# Altium PCB STM_BLUEPILL.PcbDoc
Units mil, origin at the board's own origin, x right, y up, seen from the top; angles counter-clockwise.
Board outline 2100 x 900 mil, 2 copper layers (Top Layer, Bottom Layer); 30 components, 49 nets, 163 pads, 40 vias.
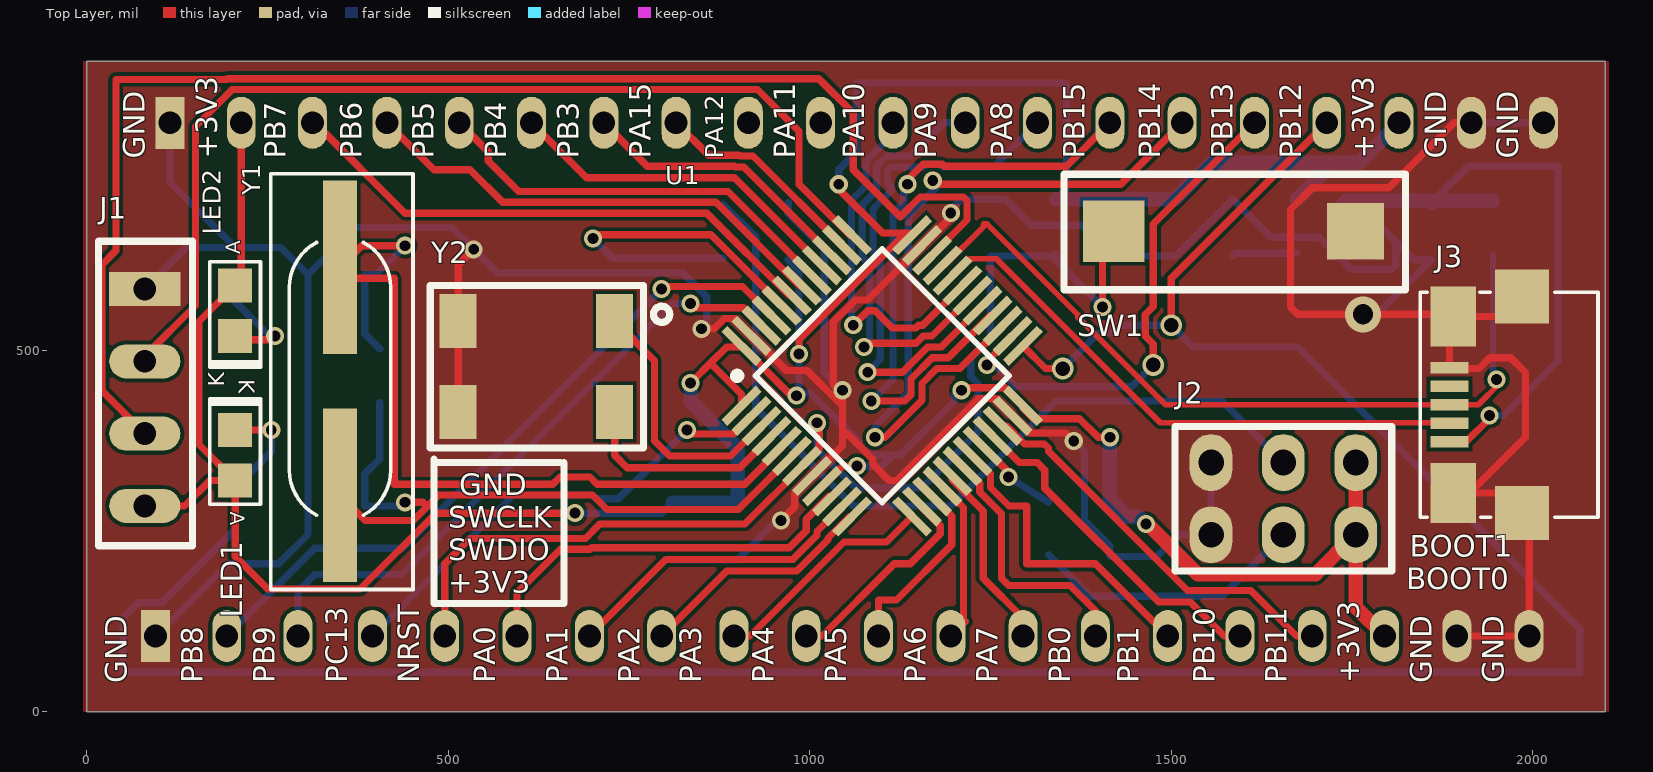
[diagram p0: Top Layer view]
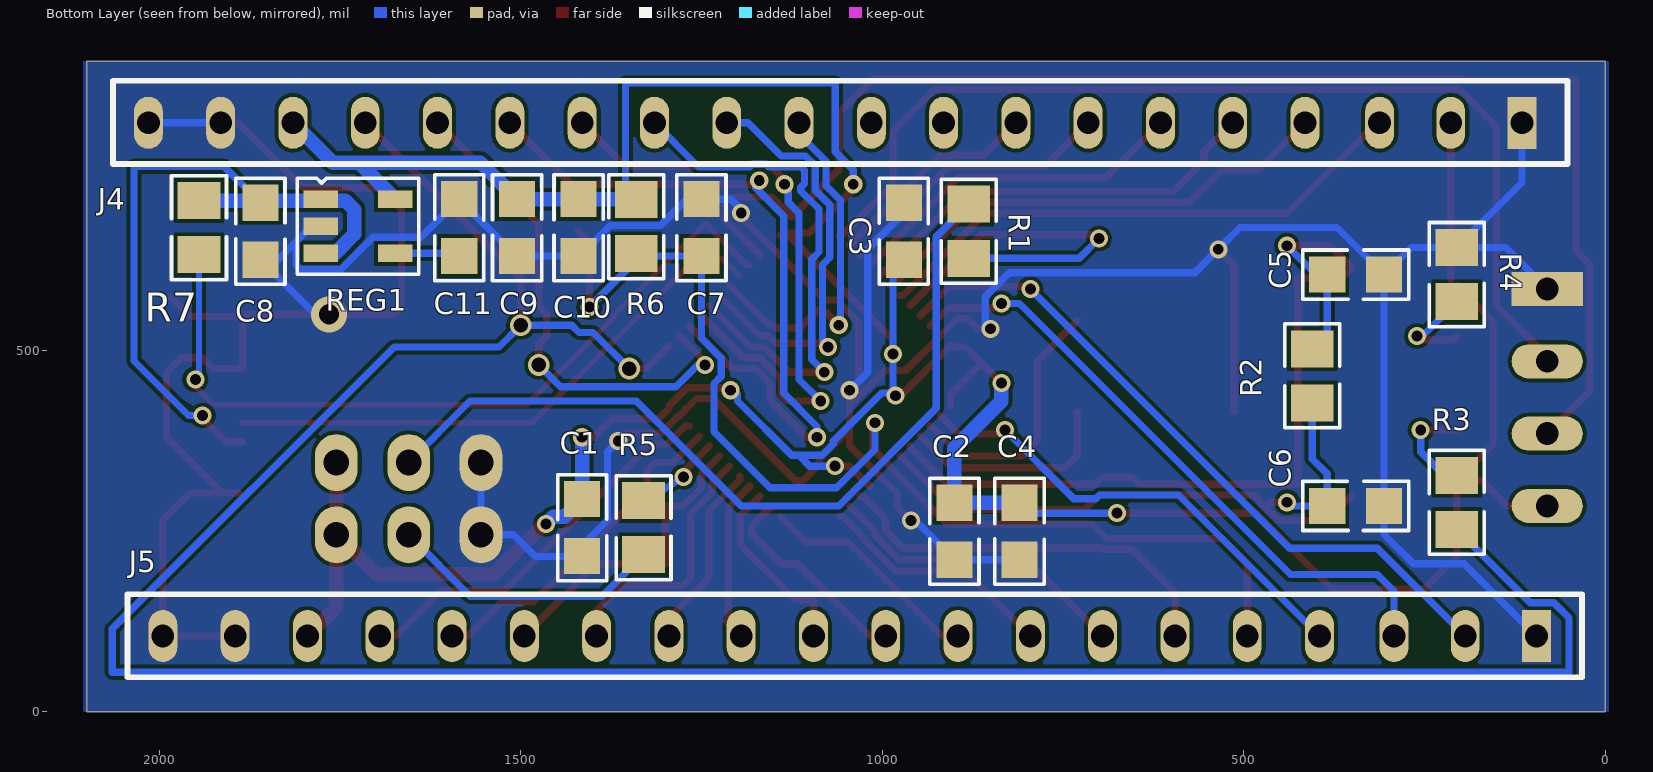
[diagram p1: Bottom Layer view, seen from below]
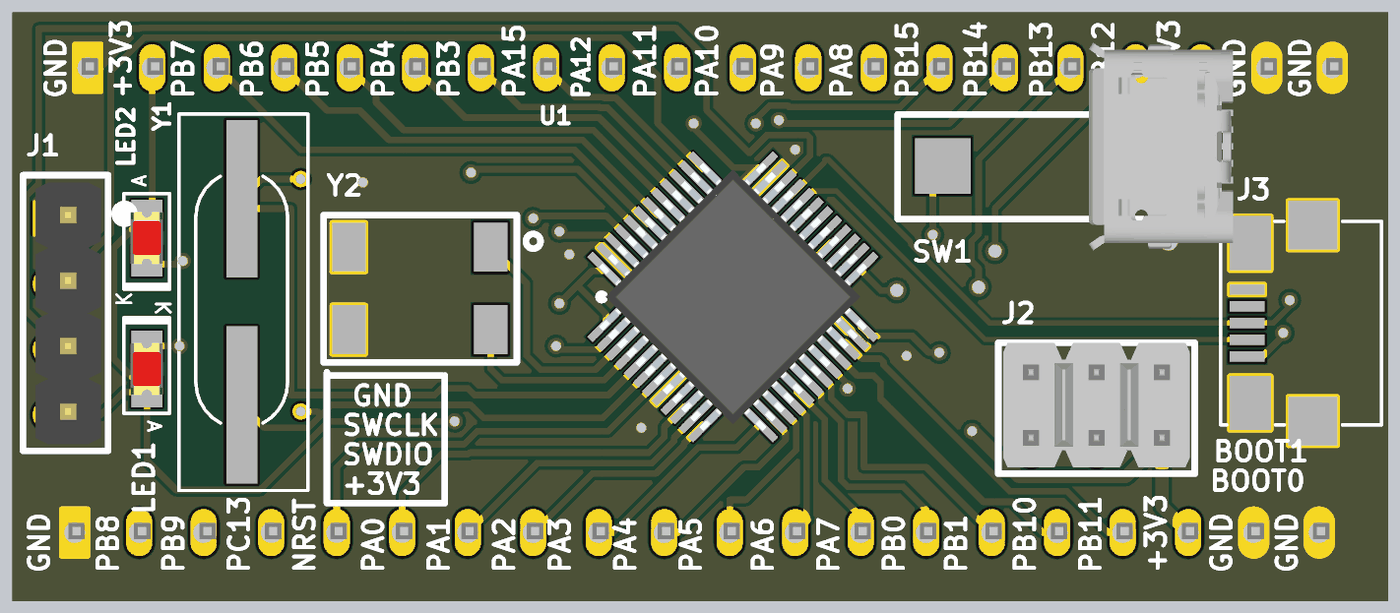
[diagram p2: 3D render of the assembled board from above, using the file's embedded part models]
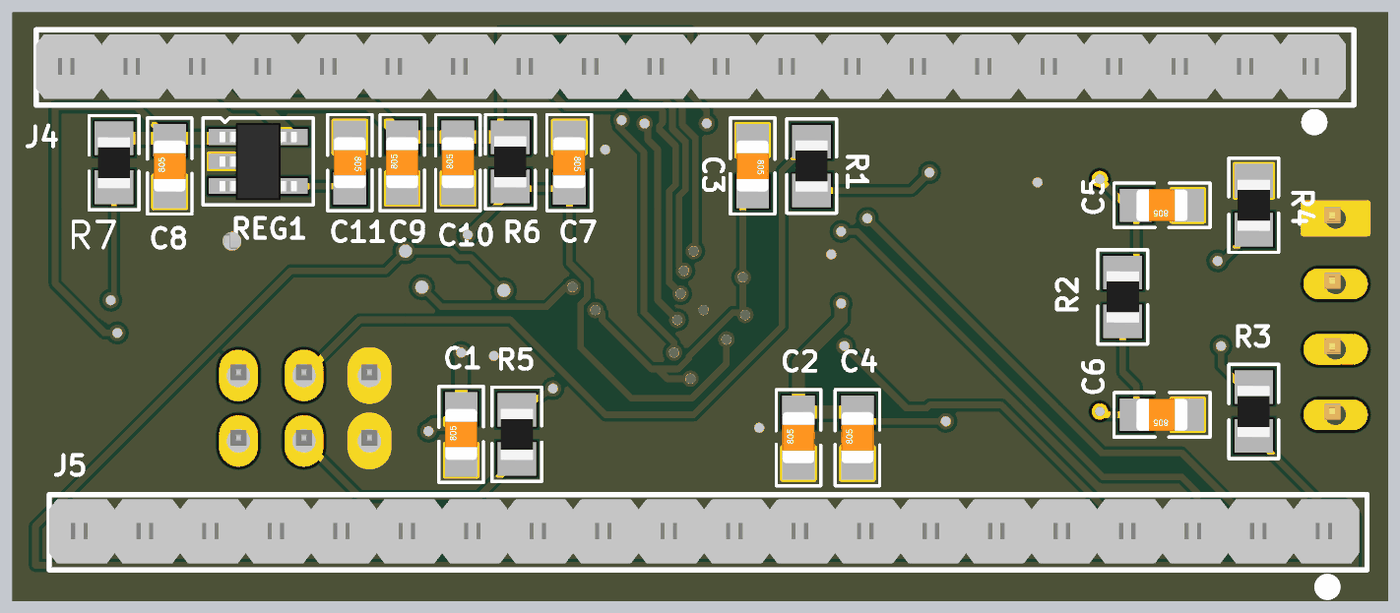
[diagram p3: 3D render of the assembled board from below, using the file's embedded part models]

## Layer stack, top to bottom
Top Layer: signal copper 1.4
Dielectric: dielectric 12.6, FR-4, Dk 4.8
Bottom Layer: signal copper 1.4

## Board outline
0,0 2100,0 2100,900 0,900

## Design rules (kind name [scope] priority, off if disabled: settings)
Clearance [All] p1: gap=5
DiffPairsRouting DiffPair_90DiffPairsRouting [InDifferentialPair ('D')] p1: maxlimit=10 minlimit=10 mostfreqgap=10 maxuncoupledlength=500
DiffPairsRouting [All] p2: maxlimit=10 minlimit=10 mostfreqgap=10 maxuncoupledlength=500
MatchedLengths DiffPair_90MatchedLengths [InDifferentialPair ('D')] p1: tolerance=1000 checknetsindiffpair=TRUE checkdiffpairvsdiffpair=TRUE checkothers=TRUE
PolygonConnect [All] p1: connectstyle=Direct reliefconductorwidth=10 reliefentries=4 polygonreliefangle="90 Angle"
RoutingVias [All] p1: holewidth=20 width=35 viastyle="Through Hole" minholewidth=10 minwidth=20 maxholewidth=28 maxwidth=50
SilkToSilkClearance [All] p1: silktosilkclearance=5
SilkscreenOverComponentPads SilkToSolderMaskClearance [IsPad] p1: minsilkscreentomaskgap=10
SolderMaskExpansion [All] p1: expansion=4
TestPointUsage FabricationTestPointUsage [All] p1: valid=0 allowmultiple=FALSE
Testpoint FabricationTestpoint [All] p1: side=3 testpointundercomponent=TRUE minsize=40 maxsize=100 preferedsize=60 minholesize=0 maxholesize=40 preferedholesize=32 testpointgrid=1 style=297 order=0123456789
Width DiffPair_90Width [InDifferentialPair('D')] p1: maxlimit=8 minlimit=8 preferedwidth=8
Width [All] p2: maxlimit=50 minlimit=10 preferedwidth=10
21 further rules are at their usual default settings.

## Classes and differential pairs
component class "[2]- Connector_Page": C8 C9 C10 C11 J3 J4 J5 R7 REG1
component class [1]-Controller_Page: C1 C2 C3 C4 C5 C6 C7 J1 J2 LED1 LED2 R1 R2 R3 R4 R5 R6 SW1 U1 Y1 Y2
differential pair D: +D_P -D_N

## Components (designator, comment, footprint, x,y, rotation, side; value= is the part's Value field where it differs from the comment)
C1 "0.1uF" CAP_0805 1415,255 r90 bottom
C2 "0.1uF" CAP_0805 900,250 r90 bottom
C3 "0.1uF" CAP_0805 970,665 r270 bottom
C4 "0.1uF" CAP_0805 810,250 r90 bottom
C5 "22pF" CAP_0805 345,605 r0 bottom
C6 "22pF" CAP_0805 345,285 r0 bottom
C7 "0.1uF" CAP_0805 1250,670.01 r270 bottom
C8 "0.1uF" CAP_0805 1860,665 r90 bottom
C9 "0.1uF" CAP_0805 1505,670 r90 bottom
C10 "1uF" CAP_0805 1420,670 r90 bottom
C11 "22pF" CAP_0805 1585,670 r270 bottom
J1 "4X1 Bergstrip" CON4_100_40D72_TH_ST_MALE 80,585 r0 top
J2 "2X3 Berg Strip" CON6_100_59D78_TH_ST_Duplicate 1755,345 r180 top
J3 "MICRO USB2.0" CON_10118192-0001LF_SMD 1935,425 r90 top
J4 "20X1 Bergstrip" CON20_100_40D72_TH_ST 115,815 r270 bottom
J5 "20X1 Bergstrip" CON20_100_40D72_TH_ST 95,105 r270 bottom
LED1 "RED LED" LED_0805 205,355 r270 top
LED2 "RED LED" LED_0805 205,555 r90 top
R1 "10K" RES_0805 880,665 r270 bottom
R2 "10Mohm" RES_0805 405,465 r90 bottom
R3 "1K" RES_0805 205,290 r270 bottom
R4 "1K" RES_0805 205,605 r90 bottom
R5 "10K" RES_0805 1330,255 r90 bottom
R6 "10K" RES_0805 1340,671.38 r270 bottom
R7 "10K" RES_0805 1945,670 r270 bottom
REG1 "RT9193-33GB" SOT23-5 1725,671.87 r270 bottom
SW1 "TACT SWITCH" SW_342_SMD 1755,665 r0 top
U1 "STM32F103C8T6" LQFP-48_19.6_393_58X11_SMD 1100,465 r45 top
Y1 "8MHz" XTAL_314_240X47_SMD 350,615 r270 top
Y2 "32.768KHz" "XTAL_MC-405 32.7680K-G3" 730,415 r180 top

## Footprints (in the part's own frame and the unit in brackets; to place one, negate y for a bottom-side part, rotate by r counter-clockwise, add the part's x,y. Pads: shape width x height; smd on the part's side, far side on the other; paste and mask are expansions set on the pad)
CAP_0805 [mil] "Ceramic Capacitor"
  rect 50x50 smd mask+3: 1(-39.37,0) 2(39.37,0)
  silkscreen extent -73,-34 73,34, body extent -39,-25 39,25, height 31
CON4_100_40D72_TH_ST_MALE [mm] "Berg Strip"
  rect 2.5x1.2 hole 0.8: 1(0,0)
  oval 2.5x1.2 hole 0.8: 2(0,-2.54) 3(0,-5.08) 4(0,-7.62)
  round 1.016 on Top Overlay: ""(2.311,0.178)
  silkscreen extent -1.63,-9.02 1.68,1.68, body extent -1.14,-8.76 1.4,1.4, height 8.55
CON6_100_59D78_TH_ST_Duplicate [mm] "Berg strip"
  oval 1.5x2 hole 0.9: 1(0,0) 2(0,2.54) 3(2.54,0) 4(2.54,2.54) 5(5.08,0) 6(5.08,2.54)
  silkscreen extent -1.27,-1.27 6.35,3.81, body extent -1.07,-1.27 6.15,3.56, height 8.18
CON20_100_40D72_TH_ST [mil] "Berg strip"
  rect 72x40 hole 31.5: 1(0,0)
  oval 72x40 hole 31.5: 2(0,-98.43) 3(0,-196.85) 4(0,-300) 5(0,-400) 6(0,-500) 7(0,-600) 8(0,-700) 9(0,-800) 10(0,-900) 11(0,-1000) 12(0,-1100) 13(0,-1200) 14(0,-1300) 15(0,-1400) 16(0,-1500) 17(0,-1600) 18(0,-1700) 19(0,-1800) 20(0,-1900)
  round 40 on Bottom Overlay: ""(83,2.57)
  silkscreen extent -58,-1949 57,63, body extent -51,-1949 47,51, height 323
CON_10118192-0001LF_SMD [mm] "USB2.0 MICRO"
  rect 0.4x1.35 smd: 1(-1.3,1.275) 2(-0.65,1.275) 3(0,1.275) 4(0.65,1.275) 5(1.3,1.275)
  rect 2.1x1.6 smd: 6(-3.1,1.15) 7(3.1,1.15)
  rect 1.9x1.9 smd: 8(-3.8,-1.275) 9(3.8,-1.275)
  silkscreen extent -3.95,-3.94 3.95,2.3, body extent -4.04,-3.94 4.04,1.66, height 2.81
LED_0805 [mm] "LED"
  rect 1.2x1.2 smd mask+0.076: A(0.889,0) K(-0.889,0)
  silkscreen extent -1.99,-0.89 1.73,0.89, body extent -1.01,-0.62 1.01,0.63, height 1.1
LQFP-48_19.6_393_58X11_SMD [mm] "48LQFP"
  rect 1.7x0.3 smd mask+0.076: 1(-4.238,2.75) 2(-4.238,2.25) 3(-4.238,1.75) 4(-4.238,1.25) 5(-4.238,0.75) 6(-4.238,0.25) 7(-4.238,-0.25) 8(-4.238,-0.75) 9(-4.238,-1.25) 10(-4.238,-1.75) 11(-4.238,-2.25) 12(-4.238,-2.75) 25(4.238,-2.75) 26(4.238,-2.25) 27(4.238,-1.75) 28(4.238,-1.25) 29(4.238,-0.75) 30(4.238,-0.25) 31(4.238,0.25) 32(4.238,0.75) 33(4.238,1.25) 34(4.238,1.75) 35(4.238,2.25) 36(4.238,2.75)
  rect 0.3x1.7 smd mask+0.076: 13(-2.75,-4.238) 14(-2.25,-4.238) 15(-1.75,-4.238) 16(-1.25,-4.238) 17(-0.75,-4.238) 18(-0.25,-4.238) 19(0.25,-4.238) 20(0.75,-4.238) 21(1.25,-4.238) 22(1.75,-4.238) 23(2.25,-4.238) 24(2.75,-4.238) 37(2.75,4.238) 38(2.25,4.238) 39(1.75,4.238) 40(1.25,4.238) 41(0.75,4.238) 42(0.25,4.238) 43(-0.25,4.238) 44(-0.75,4.238) 45(-1.25,4.238) 46(-1.75,4.238) 47(-2.25,4.238) 48(-2.75,4.238)
  silkscreen extent -3.72,-3.15 3.15,3.72, body extent -4.5,-4.5 4.5,4.5, height 1.7
RES_0805 [mm] "Resister"
  rect 1.3x1.5 smd mask+0.076: 1(0.95,0) 2(-0.95,0)
  silkscreen extent -1.83,-0.97 1.83,0.97, body extent -1,-0.63 1,0.62, height 0.5
SOT23-5 [mm] "CASE: SOT"
  rect 0.62x1.22 smd mask+0.076: 1(-0.953,-1.31) 2(-0.003,-1.31) 3(0.947,-1.31) 4(0.952,1.31) 5(-0.953,1.31)
  silkscreen extent -1.69,-2.14 1.69,2.14, body extent -1.5,-1.5 1.5,1.5, height 1.41
SW_342_SMD [mm] "CASE: SMD"
  rect 2x2 smd: 1(0,0)
  rect 2.15x2.15 smd: 2(-8.5,0)
  silkscreen extent -10.25,-2.06 1.75,2, body extent -7.17,-1.79 -1.17,1.71, height 2.4
XTAL_314_240X47_SMD [mm] "CASE: TH"
  rect 6.096x1.2 smd: 1(0,0) 2(8,0)
  silkscreen extent -3.29,-2.44 11.32,2.57, body extent -2.99,-2.27 10.9,2.41, height 3.05
"XTAL_MC-405 32.7680K-G3" [mm] "Crystal"
  rect 1.3x1.9 smd: 1(0,-3.2) 2(5.5,-3.2) 3(5.5,0) 4(0,0)
  silkscreen extent -1.93,-4.44 6.48,1.27, body extent -1.02,-4.44 6.48,1.27, height 3.6

## Part data
C1 C2 C3 C4 C7 C8 C9: library part CAP_0.1uF-50V-5%-0805, "0.1µF ±5% 50V Ceramic Capacitor X7R 0805 (2012 Metric)"
C5 C6 C11: library part CAP_22pF-50V-5%-0805, "22pF ±5% 50V Ceramic Capacitor C0G, NP0 0805 (2012 Metric)"
C10: library part CAP_1uF-50V-5%-0805, "1µF ±5% 50V Ceramic Capacitor X7R 0805 (2012 Metric)"
J1: library part CON-BS-PLG_4X1-100-TH-ST, "4 pin, 1 row, 2.54mm pitch bergstrip"
J2: library part CON-BS-PLG_2X3-100-TH-ST, "6 pin, 2 row, 2.54mm pitch bergstrip"
J3: library part CON-USB_10118192-0002LF-SMD, "USB - micro B USB 2.0 Receptacle Connector 5 Position Surface Mount, Right Angle"
J4 J5: library part CON-BS-PLG_20X1-100-TH-ST, "20 pin, 1 row, 2.54mm pitch bergstrip"
LED1 LED2: library part LED-RED_10mA-0805, "Red 621nm LED Indication - Discrete 2V 0805 (2012 Metric)"
R1 R5 R6 R7: library part RES_10K-0.125W-1%-0805, "10 kOhms ±1% 0.125W, 1/8W Chip Resistor 0805 (2012 Metric) Moisture Resistant Thick Film"
R2: library part RES_10MOHM-0.125W-1%-0805, "10 MOhms ±1% 0.125W, 1/8W Chip Resistor 0805 (2012 Metric) Automotive AEC-Q200, High Voltage Thick Film"
R3 R4: library part RES_1K-0.125W-1%-0805, "1 kOhms ±1% 0.125W, 1/8W Chip Resistor 0805 (2012 Metric) Moisture Resistant Thick Film"
REG1: library part REG_3.3V-5.5V-0.3A-SOT-23-5, "Linear Voltage Regulator IC 1 Output 300mA SOT-23-5"
SW1: library part SW_KSR223GLFG-SMD, "Tactile Switch SPST-NO Top Actuated Surface Mount"
U1: library part "IC-STM32F103C8T6 _1", "ARM® Cortex®-M3 STM32F1 Microcontroller IC 32-Bit 72MHz 64KB (64K x 8) FLASH"
Y1: library part XTAL_8MHZ-LFXTAL030234, "Crystals 8MHz 22pF -20C 70C"
Y2: library part "XTAL_32.768KHz-MC-405 32.7680K-G3", "Crystals SMD AT XTL MHZ +/-50PPM 12.5 PF 250 T/R"

## Via types
v1: diameter 25, hole 15, Top Layer to Bottom Layer, tented both sides, 34 vias
v2: diameter 30, hole 20, Top Layer to Bottom Layer, tented both sides, 3 vias
v3: diameter 25, hole 15, Top Layer to Bottom Layer, 2 vias
v4: diameter 50, hole 28, Top Layer to Bottom Layer, tented both sides, 1 vias

## Nets (pads, with @x,y where several pads share a name; then routed paths per layer and width w, separated by ;. In a path a pad name is that pad's centre, name@x,y a point inside that pad or via, vN(x,y) a via of type N, cw(c..) or ccw(c..) an arc to the next point about the centre after c; other vN are vias at no path point)
+3V3: C1.2 C2.2 C3.2 C4.2 C9.2 C10.2 J1.4 J2.1 J2.2 J4.2 J4.18 J5.18 LED1.A LED2.A R6.2 REG1.5 U1.1 U1.9 U1.24 U1.36 U1.48 | length 5163.8
  Top Layer w10: J1.4 135,285 170,320 LED1.A ; LED2.A 155,540 155,370 LED1.A ; LED2.A@213.43,598.42 J4.2 ; v1(675,275) 482.72,275 377.76,170.04 250.04,170.04 250,170 205,215 LED1.A ; v1(835,455) 865,485 ; U1.48@905,505 885,505 865,485 ; U1.1 905.46,439.54 865,480 865,485 ; U1.48 974.39,437.5 v1(981.29,437.5) ; v1(985,495) 985,515 1129.54,659.54 U1.36 1138.46,662.5 1100.68,662.5 1040,723.18 v1(1040,730) ; U1.9 1017.22,312.22 1045,340 v1(1065,340) ; v1(1210,445) 1210,446.39 1212.18,448.58 1269.54,448.58 U1.24 ; U1.24@1295,420 1309.26,405.74 1373.15,405.74 1398.89,380 v1(1415,380)
  Top Layer w20: v1(1465,260) 1467.19,260 1536.56,190.63 1699.53,190.63 1753.9,245 J2.2 ; J2.1 J2.2 ; J5.18 1755,145 J2.2
  Bottom Layer w10: v1(675,275) 795.63,275 C4.2 ; C3.2 985,610.62 v1(985,495) 985,441.21 1000.61,441.21 1067.5,374.32 1067.5,370.68 1083.18,355 1115,355 ; v1(1040,730) 1040,750 1065,775 1065,870 1355,870 1355,723.78 1340.6,709.37 R6.2 ; v1(1065,340) 1100,340 1115,355 ; v1(1210,445) 1205,445 1200,440 1200,430 1125,355 1115,355
  Bottom Layer w20: C4.2 C2.2 900,365 835,430 v1(835,455) ; R6.2@1340.6,709.37 C10.2 C9.2 1555.63,760 1724.06,760 ; v1(1415,380) C1.2 1439.38,270 1455,270 v1(1465,260) ; REG1.5 1724.06,760 ; J4.18 1760,760 1724.06,760
+5V: C8.2 J3.1 R7.2 REG1.1 REG1.3 | length 975.8
  Top Layer w10: J3.1 1907.8,373.82 1940,406.02 v1(1940,410)
  Bottom Layer w10: C8.2@1863.03,707.4 1910.63,755 2035,755 2035,485.5 1959.5,410 v1(1940,410)
  Bottom Layer w20: REG1.3 1756.55,634.57 1730,661.12 1730,695 1742.4,707.4 C8.2@1863.03,707.4 ; C8.2 C8.2@1863.03,707.4 ; R7.2 C8.2@1863.03,707.4
BOOT0: J2.3 R1.2 | length 1182.2
  Bottom Layer w10: R1.2 925,657.4 925,420 1060,285 1195,285 1340,430 1570,430 J2.3
BOOT1: J2.4 R5.2 | length 384.1
  Bottom Layer w10: R5.2 1387.6,160 1570,160 J2.4
D_N: J3.2 U1.32 | length 791.4
  Top Layer w8: U1.32 1198.11,603.86 1221.03,626.78 1257.76,626.78 1484.54,400 1884.21,400 J3.2
D_P: J3.3 R7.1 U1.33 | length 1096.5
  Top Layer w8: U1.33 1186.58,617.78 1239.71,670.92 1239.71,674.31 1240.4,675 1245,675 1371,549 1371,545.92 1491.92,425 J3.3 1924.59,425 1954.59,455 1954.59,455.41 v1(1950,460)
  Bottom Layer w8: R7.1 1945,465 v1(1950,460)
GND: C1.1 C2.1 C3.1 C4.1 C5.1 C6.1 C7.1 C8.1 C9.1 C10.1 C11.1 J1.1 J2.5 J2.6 J3.5 J3.6 J3.7 J3.8 J3.9 J4.1 J4.19 J4.20 J5.1 J5.19 J5.20 R4.1 REG1.2 SW1.1 U1.8 U1.23 U1.35 U1.47 Y2.2 Y2.3 | length 6816.5
  Top Layer w10: Y2.3 Y2.2 513.46,618.46 v1(535,640) ; v1(850,530) 867.57,530 881.83,544.26 895.74,544.26 919.38,520.62 U1.47 967.23,472.5 995.79,472.5 1045,423.29 1045,394.73 ; v1(960,265) 978.98,283.98 978.98,302.22 U1.8 1045,368.24 1045,385 ; v1(1045,445) v1@1040,445 ; v1(1195,690) 1195,684.29 1156.33,645.62 U1.35 1079.73,570 1063.18,570 1032.5,539.32 1032.5,452.5 v1@1040,445 ; v1(1365,375) 1354.26,385.74 1305.62,385.74 1281.7,409.66 U1.23 1256.7,433.58 1233.58,433.58 1120,320 1110,320 1087.5,342.5 1087.5,349.32 1051.82,385 1045,385 ; J3.7@1886.77,550 v4(1765,550) 1675,550 1665,560 1665,695 1695,725 1801,725 1891,815 J4.19 ; J5.19 J5.20 1995,265.59 1957.64,302.95 J3.6 1912.95,302.95 1990,380 1990,469.49 1969.49,490 1940.5,490 1925.5,475 1885.98,475 J3.5 1884.8,542.13 J3.7 1957.64,547.05 J3.9 ; v1@1040,445 1045,440 1045,394.73 ; 1045,385 1045,394.73
  Bottom Layer w10: J1.1 137.4,642.4 R4.1 ; J5.1 195,205 265,205 305.63,245.63 C6.1 C5.1 ; J4.1 115,732.41 R4.1 ; C4.1 C2.1 954.37,265 v1(960,265) ; v1(850,530) 855.14,530 857.5,532.36 857.5,574.32 824.32,607.5 567.5,607.5 v1(535,640) 505,670 370.64,670 C5.1 ; C3.1 970,690 1020,640 1020,470 v1(1045,445) ; v1(1195,690) 1195,695 1209.37,709.37 C7.1 1270.14,709.37 1306.33,673.18 1375.9,673.18 1418.45,630.63 1506.26,630.63 C11.1 1637.79,656.58 1704.21,656.58 1748.42,612.37 1804.74,612.37 1810.59,618.22 1810.59,650.92 ; v1(1365,375) 1380,360 1380,265.23 1415,230.23 C1.1 1415.64,215 1480,215 1510,245 J2.6 J2.5 ; v4(1765,550) 1771.26,543.74 1778.11,543.74 C8.1 1835.88,625.63 1810.59,650.92 ; REG1.2 1789.54,671.97 1810.59,650.92 ; J4.19 J4.20 ; R4.1 268.23,642.4 C5.1
NetC11_2: C11.2 REG1.4 | length 90
  Bottom Layer w10: C11.2 1588.74,634.37 REG1.4
NetLED1_K: LED1.K R3.2 | length 143.5
  Top Layer w10: LED1.K v1(255,390)
  Bottom Layer w10: R3.2 222.4,327.4 255,360 v1(255,390)
NetLED2_K: LED2.K R4.2 | length 133.9
  Top Layer w10: LED2.K 210,515 255,515 v1(260,520)
  Bottom Layer w10: R4.2 252.6,520 v1(260,520)
NetR1_1: R1.1 U1.44 | length 495.1
  Top Layer w10: v1(700,655) 705,660 863.24,660 U1.44
  Bottom Layer w10: v1(700,655) 727.4,627.6 R1.1
NetR5_1: R5.1 U1.20 | length 123.1
  Top Layer w10: U1.20 1275,331.76 v1(1275,325)
  Bottom Layer w10: v1(1275,325) R5.1@1330,290
NRST: C7.2 J5.5 R6.1 SW1.2 U1.7 | length 1597.4
  Top Layer w10: J5.5 495,205 530,240 689.5,240 709.5,260 910,260 988.98,338.98 U1.7 1012.9,363.98 1012.9,397.1 v1(1010,400) ; v1(1405,560) 1405,649.65 SW1.2
  Bottom Layer w10: v1(1010,400) 1010,363.18 1063.18,310 1155,310 1232.5,387.5 1232.5,454.32 1222.5,464.32 1222.5,489.32 1250,516.82 C7.2 1336.66,630.63 R6.1 1340,625 v1(1405,560)
PA0: J5.6 U1.10 | length 560.3
  Top Layer w10: J5.6 595,165 655,225 695.71,225 697.84,227.13 971.62,227.13 995,250.5 995,266.41 1026.9,298.3 U1.10
PA1: J5.7 U1.11 | length 427.1
  Top Layer w10: J5.7 801.06,211.06 810,211.06 976.77,211.06 1010,244.29 1010,249.73 U1.11
PA2: J5.8 U1.12 | length 333.7
  Top Layer w10: J5.8 885,195 981.92,195 1025,238.08 1025,240.73 1054.73,270.46 U1.12
PA3: J5.9 U1.13 | length 315
  Top Layer w10: J5.9 917.11,105 1047.11,235 1105.96,235 U1.13
PA4: J5.10 U1.14 | length 292.2
  Top Layer w10: J5.10 1016.87,105 1116.87,205 1138.93,205 1180.33,246.39 1180.33,257.48 1155.34,282.46 U1.14
PA5: J5.11 U1.15 | length 261.2
  Top Layer w10: J5.11 1095,155 1120,155 1196.39,231.39 1196.39,271.18 U1.15
PA6: J5.12 U1.16 | length 228.7
  Top Layer w10: U1.16 1212.45,282.95 1212.45,127.55 1215,125 J5.12
PA7: J5.13 U1.17 | length 261.7
  Top Layer w10: U1.17 1197.1,320.97 1240,278.08 1240,185 1295,130 J5.13
PA8: J4.13 U1.29 | length 737.8
  Top Layer w10: v1(1080,470) 1128.08,470 1163.08,505 1181.76,505 U1.29
  Bottom Layer w10: v1(1080,470) 1097.5,487.5 1097.5,626.22 1087.5,636.22 1087.5,695.58 1112.5,720.58 1112.5,725.68 1107.5,730.68 1107.5,749.32 1112.18,754 1157.18,754 1160.68,757.5 1179.32,757.5 1182.82,754 1254,754 J4.13
PA9: J4.12 U1.30 | length 592.6
  Top Layer w10: v1(1075,505) 1080,510 1146.86,510 1156.86,520 1168.92,520 U1.30
  Bottom Layer w10: v1(1075,505) 1082.5,512.5 1082.5,618.5 1072.5,628.5 1072.5,701.79 1092.5,721.79 1092.5,755.53 1105.97,769 1139.71,769 1185.71,815 J4.12
PA10: J4.11 U1.31 | length 498.4
  Top Layer w10: v1(1060,535) 1080,555 1090,555 1113.92,531.08 1146.73,531.08 1150.65,535 1156.08,535 U1.31
  Bottom Layer w10: v1(1060,535) 1057.5,537.5 1057.5,708 1077.5,728 1077.5,761.75 1115,799.25 J4.11
PA11: J4.10
PA12: J4.9
PA15: J4.8 U1.38 | length 299.8
  Top Layer w10: J4.8 860,770 901.57,770 902.57,769 921.27,769 U1.38
PB0: J5.14 U1.18 | length 361.1
  Top Layer w10: U1.18 1234.94,316.14 1234.94,304.35 1265,274.29 1265,185 1275,175 1360,175 1395,140 J5.14
PB1: J5.15 U1.19 | length 430.8
  Top Layer w10: U1.19 1250,328.92 1250,310.5 1275.5,285 1300,285 1300,205 1395,205 J5.15
PB3: J4.7 U1.39 | length 391.7
  Top Layer w10: J4.7 775,755 895.36,755 896.36,754 908.44,754 U1.39
PB4: J4.6 U1.40 | length 483.5
  Top Layer w10: J4.6 691,739 895.6,739 U1.40
PB5: J4.5 U1.41 | length 582.8
  Top Layer w10: J4.5 555,775 555,762.28 597.28,720 886.76,720 U1.41
PB6: J4.4 U1.42 | length 667.2
  Top Layer w10: J4.4 480,750 530,750 575,705 870.08,705 985.14,589.94 U1.42
PB7: J4.3 U1.43 | length 762.2
  Top Layer w10: J4.3 315,815 440,690 857.24,690 971.22,576.02 U1.43
PB8: J5.2 U1.45 | length 970.8
  Top Layer w10: v1(795,585) 798.56,588.56 906.84,588.56 U1.45
  Bottom Layer w10: J5.2 315,226.57 436.57,226.57 v1(795,585)
PB9: J5.3 U1.46 | length 883.3
  Top Layer w10: v1(835,565) 835,561.04 836.79,559.25 875.6,559.25 908.3,559.26 U1.46
  Bottom Layer w10: J5.3 291.85,166.85 315,190 435,190 810,565 v1(835,565)
PB10: J5.16 U1.21 | length 471.5
  Top Layer w10: U1.21 1289.6,345 1314.5,345 1325,334.5 1325,309.6 1482.53,152.06 1526.06,152.06 1573.13,105 J5.16
PB11: J5.17 U1.22 | length 551.4
  Top Layer w10: U1.22 1272.04,395.74 1297.04,370.74 1324.26,370.74 1330,365 1330,360.5 1522.38,168.13 1610,168.13 1673.13,105 J5.17
PB12: J4.17 R3.1 U1.25 | length 3707.2
  Top Layer w10: U1.25 1325.96,475 v2(1350,475) ; v2(1500,535) 1500,600 J4.17
  Bottom Layer w10: R3.1 103.4,151 70.86,151 50,130.14 50,55 2065,55 2065,115 1675,505 1530,505 v2(1500,535) 1429.5,535 1419.5,525 1400,525 v2(1350,475)
PB13: J4.16 U1.26 | length 718.8
  Top Layer w10: v1(1245,480) 1240.27,480 U1.26 ; v2(1475,480) 1475,509 1463.94,520.06 1463.94,549.94 1475,561 1475,675 J4.16
  Bottom Layer w10: v1(1245,480) 1255,480 1285,450 1445,450 v2(1475,480)
PB14: J4.15 U1.27 | length 1028.9
  Top Layer w10: v1(1090,380) 1104,380 1155,431 1155,454.5 1175.5,475 1207.44,475 U1.27 ; v1(1170,735) 1175,730 1430,730 J4.15
  Bottom Layer w10: v1(1090,380) 1090,395 1136.06,441.06 1136.06,660 1136.06,686.06 1175,725 1175,730 v1(1170,735)
PB15: J4.14 U1.28 | length 871.9
  Top Layer w10: v1(1085,430) 1131.28,430 1140,438.72 1140,460.71 1169.29,490 1191.28,490 1249.47,548.18 U1.28 ; v1(1135,730) 1134,731 1134,735 1156.5,757.5 1183.5,757.5 1186,755 1355,755 J4.14
  Bottom Layer w10: v1(1085,430) 1115,460 1115,690 1130,705 1130,725 v1(1135,730)
PC13: J5.4 U1.2 | length 659.1
  Top Layer w10: v1(830,390) 835.33,384.67 894.4,384.67 U1.2
  Bottom Layer w10: J5.4 590,300 699.5,300 704.5,295 735,295 v1(830,390)
SWCLK: J1.2 U1.37 | length 1410.2
  Top Layer w10: J1.2 80,492.17 150,562.17 150,810 201,861 927.43,861 985,803.43 985,730 1055.46,659.54 U1.37
SWDIO: J1.3 U1.34 | length 1934.7
  Top Layer w10: J1.3 20.79,444.21 20.79,618.62 40,637.83 40,875 193.79,875 194.79,876 1012.43,876 1060,828.43 1060,750 1125,685 1152.5,712.5 1212.5,712.5 1217.5,707.5 1217.5,680.68 1169.26,632.44 U1.34
XTALA: C5.2 R2.1 U1.5 Y1.1 | length 1219.3
  Top Layer w10: v3(440,645) 380,645 Y1.1 365,600 425,600 425,315 644.29,315 654.29,325 695.71,325 705.71,315 910,315 961.14,366.14 U1.5
  Bottom Layer w10: R2.1 384.37,523.03 C5.2 400,605 v3(440,645)
XTALB: C6.2 R2.2 U1.6 Y1.2 | length 935
  Top Layer w10: Y1.2 385.04,265 451.51,265 470.76,284.24 ; v3(440,290) 465,290 470.76,284.24 ; U1.6 901.08,280 719.5,280 699.5,300 486.51,300 470.76,284.24
  Bottom Layer w10: R2.2 405,350 384.37,329.37 C6.2 435,285 v3(440,290)
XTALC: U1.3 Y2.1 | length 363.1
  Top Layer w10: Y2.1 785,485.98 785,375 806.06,353.94 890.22,353.94 932.02,395.74 U1.3
XTALD: U1.4 Y2.4 | length 302.1
  Top Layer w10: Y2.4 730,355 747.13,337.87 902.87,337.87 U1.4@946.82,381.82
pads on no net: J1. J3.4 J4. J5.

## Polygon pours and split planes (outlines as drawn)
GND on Top Layer "Top Overlay-No Net" (solid, remove dead copper): -5,900 -5,0 2105,0 2105,900 -5,900
GND on Bottom Layer "Top Overlay-No Net" (solid, remove dead copper): -5,900 -5,0 2105,0 2105,900 -5,900

## Silkscreen, mask and mechanical layers (free items; w line width, h text height)
Top Overlay:
  lines w10: 660,345 660,150 480,150 ; 480,150 480,350 480,150 ; 480,345 655,345 480,345
  text "GND" at 80,765 h30 r90
  text "+3V3" at 180,765 h30 r90
  text "PB7" at 275,765 h30 r90
  text "PB6" at 380,765 h30 r90
  text "PB5" at 480,765 h30 r90
  text "PB4" at 580,765 h30 r90
  text "PB3" at 680,765 h30 r90
  text "PA15" at 780,765 h30 r90
  text "PA12" at 880,765 h25 r90
  text "PA11" at 980,765 h30 r90
  text "PA10" at 1075,765 h30 r90
  text "PA9" at 1175,765 h30 r90
  text "PA8" at 1280,765 h30 r90
  text "PB15" at 1380,765 h30 r90
  text "PB14" at 1485,765 h30 r90
  text "PB13" at 1585,765 h30 r90
  text "PB12" at 1680,765 h30 r90
  text "+3V3" at 1780,765 h30 r90
  text "GND" at 1880,765 h30 r90
  text "GND" at 1980,765 h30 r90
  text "GND" at 515,300 h30
  text "SWCLK" at 500,255 h30
  text "BOOT1" at 1830,215 h30
  text "SWDIO" at 500,210 h30
  text "BOOT0" at 1825,170 h30
  text "+3V3" at 500,165 h30
  text "GND" at 55,40 h30 r90
  text "PB8" at 160,40 h30 r90
  text "PB9" at 260,40 h30 r90
  text "PC13" at 360,40 h30 r90
  text "NRST" at 460,40 h30 r90
  text "PA0" at 565,40 h30 r90
  text "PA1" at 665,40 h30 r90
  text "PA2" at 765,40 h30 r90
  text "PA3" at 850,40 h30 r90
  text "PA4" at 950,40 h30 r90
  text "PA5" at 1050,40 h30 r90
  text "PA6" at 1160,40 h30 r90
  text "PA7" at 1260,40 h30 r90
  text "PB0" at 1360,40 h30 r90
  text "PB1" at 1455,40 h30 r90
  text "PB10" at 1560,40 h30 r90
  text "PB11" at 1660,40 h30 r90
  text "+3V3" at 1760,40 h30 r90
  text "GND" at 1860,40 h30 r90
  text "GND" at 1960,40 h30 r90
Mechanical 1:
  the board outline again, w10

## Text inside footprints (layer, text, board x,y; h text height)
LED1: Top Overlay "K" at 210,460 h22 r270; Top Overlay "A" at 198.11,276.75 h20 r270
LED2: Top Overlay "K" at 190,450 h22 r90; Top Overlay "A" at 211.89,633.25 h20 r90